# Altium PCB BD658T_AMP_ES4_220615_F.PcbDoc (part 1 of 4)
Units mm, origin at the board's own origin, x right, y up, seen from the top; angles counter-clockwise.
Board outline 153 x 112 mm, 4 copper layers (TOP, LAYER2, LAYER3, BOTTOM), stack 1.59 mm thick; 286 components, 184 nets, 896 pads, 614 vias.
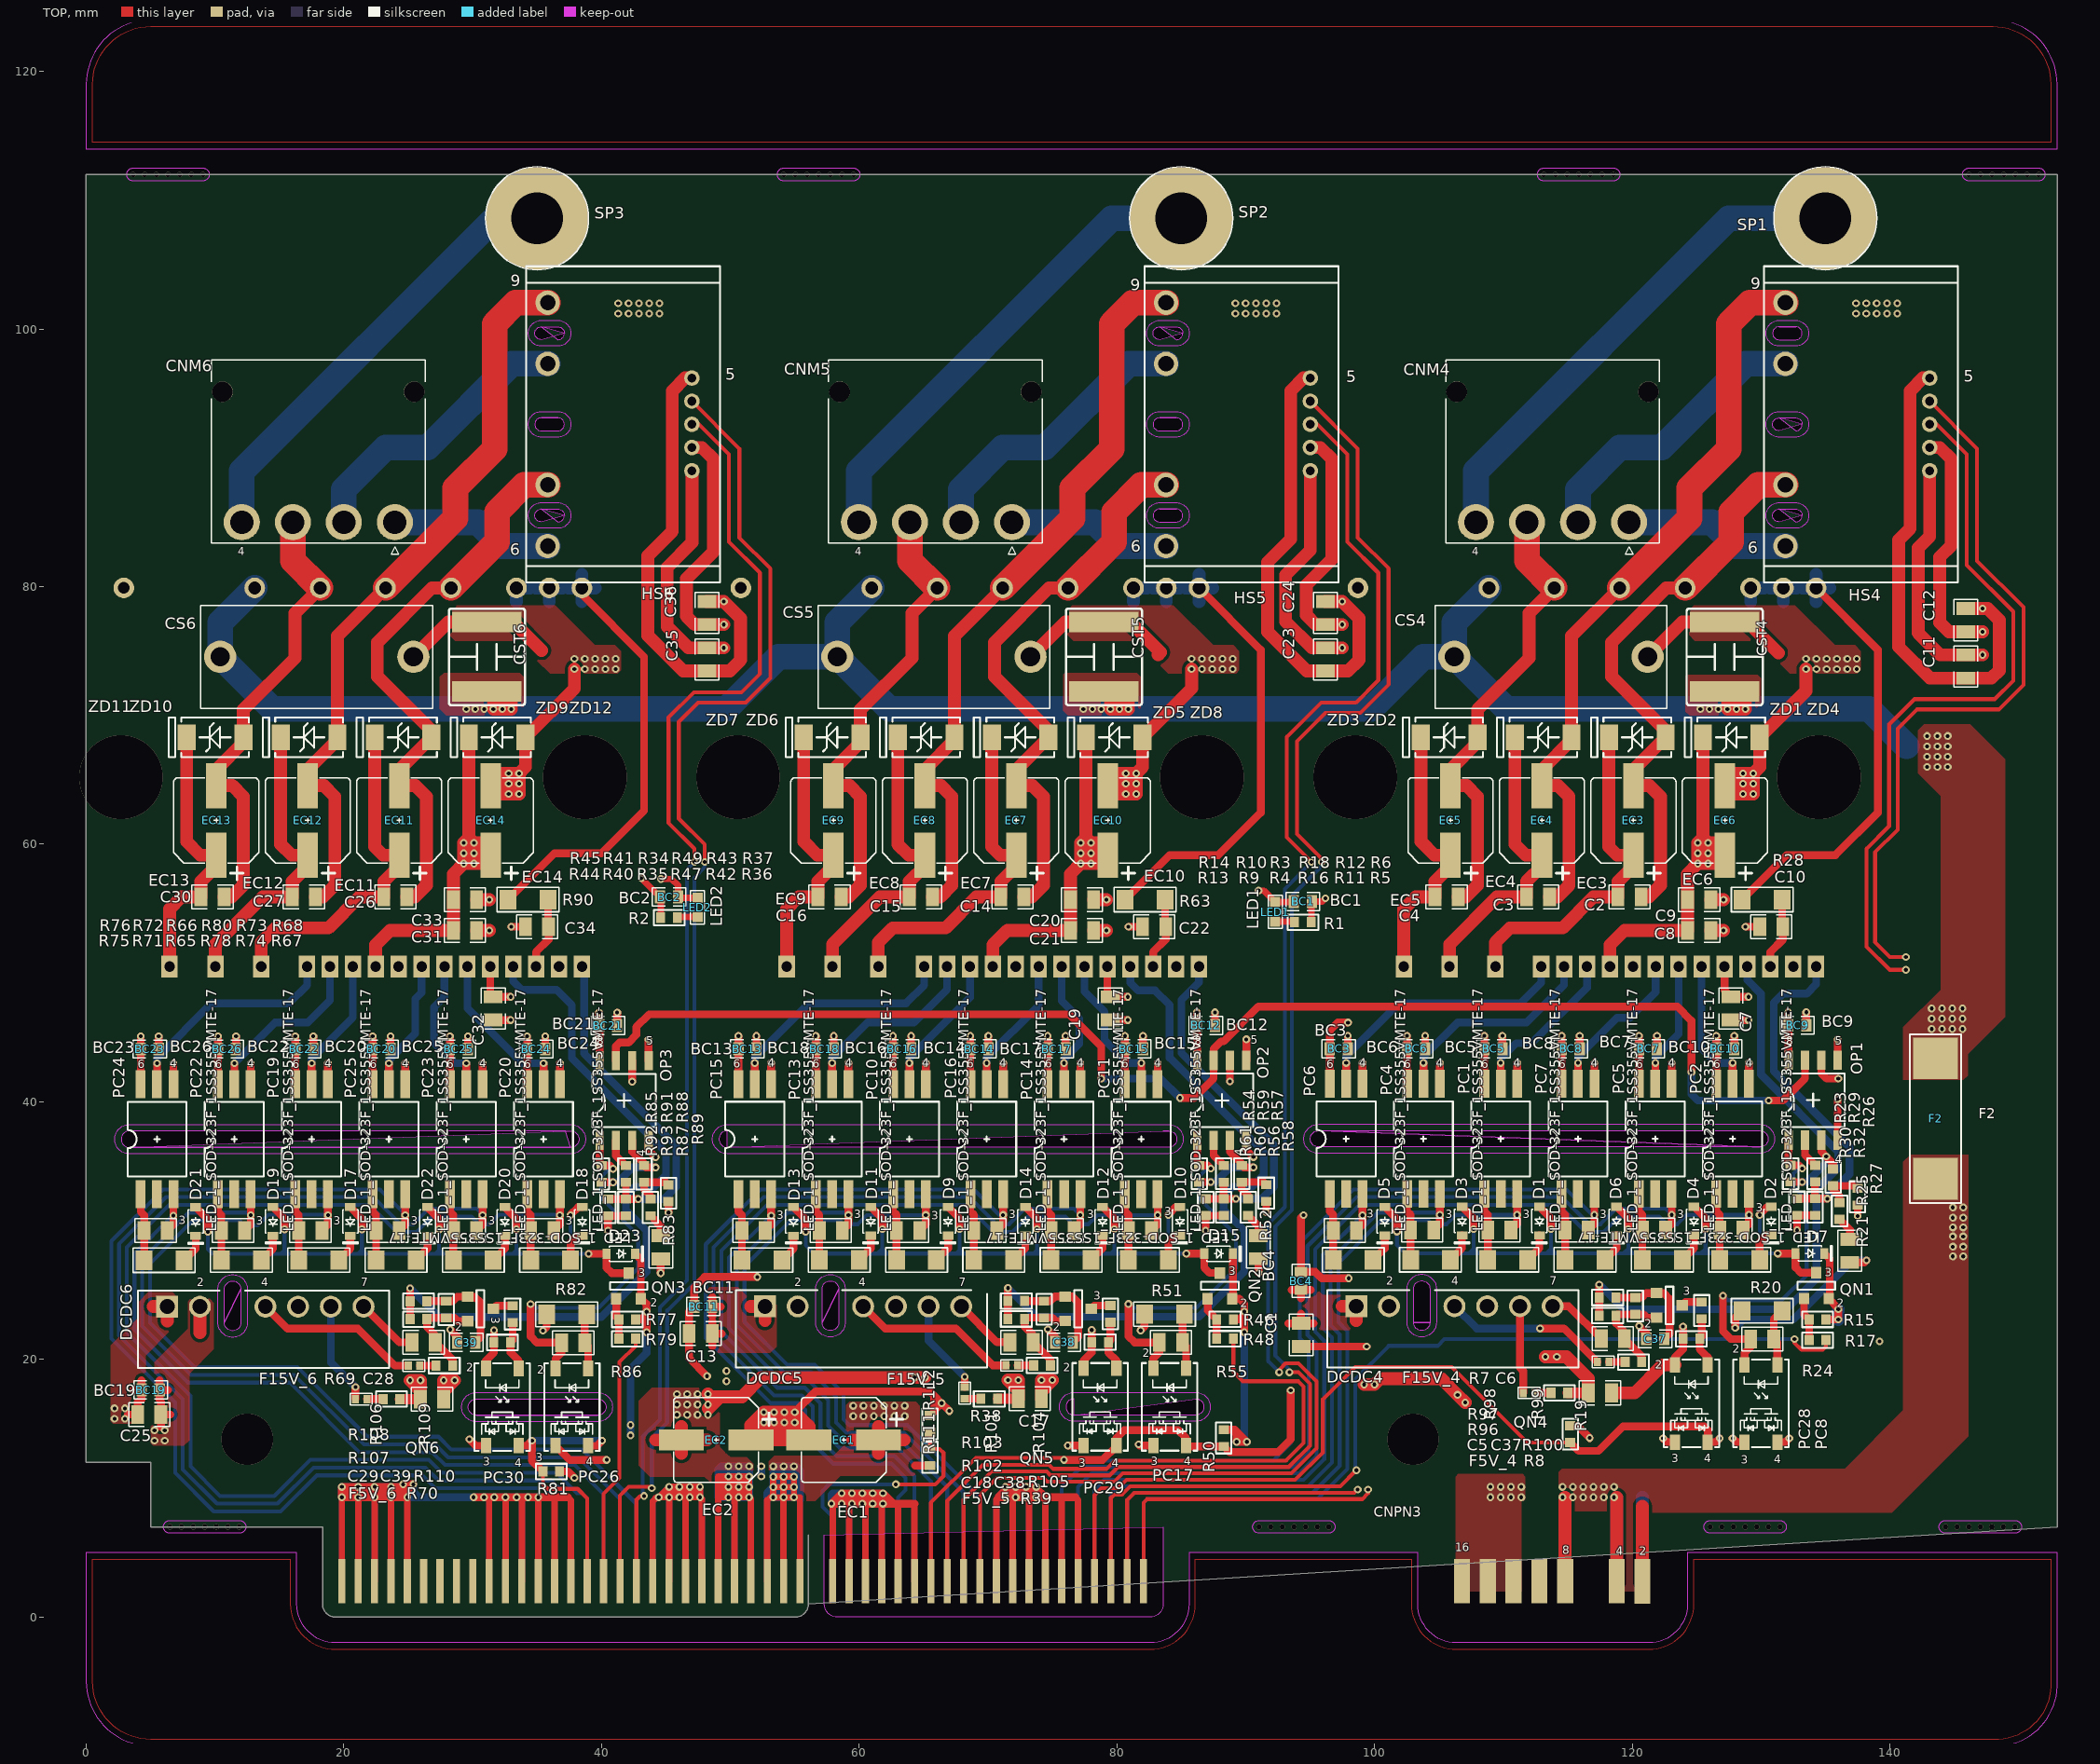
[diagram p0: TOP view]
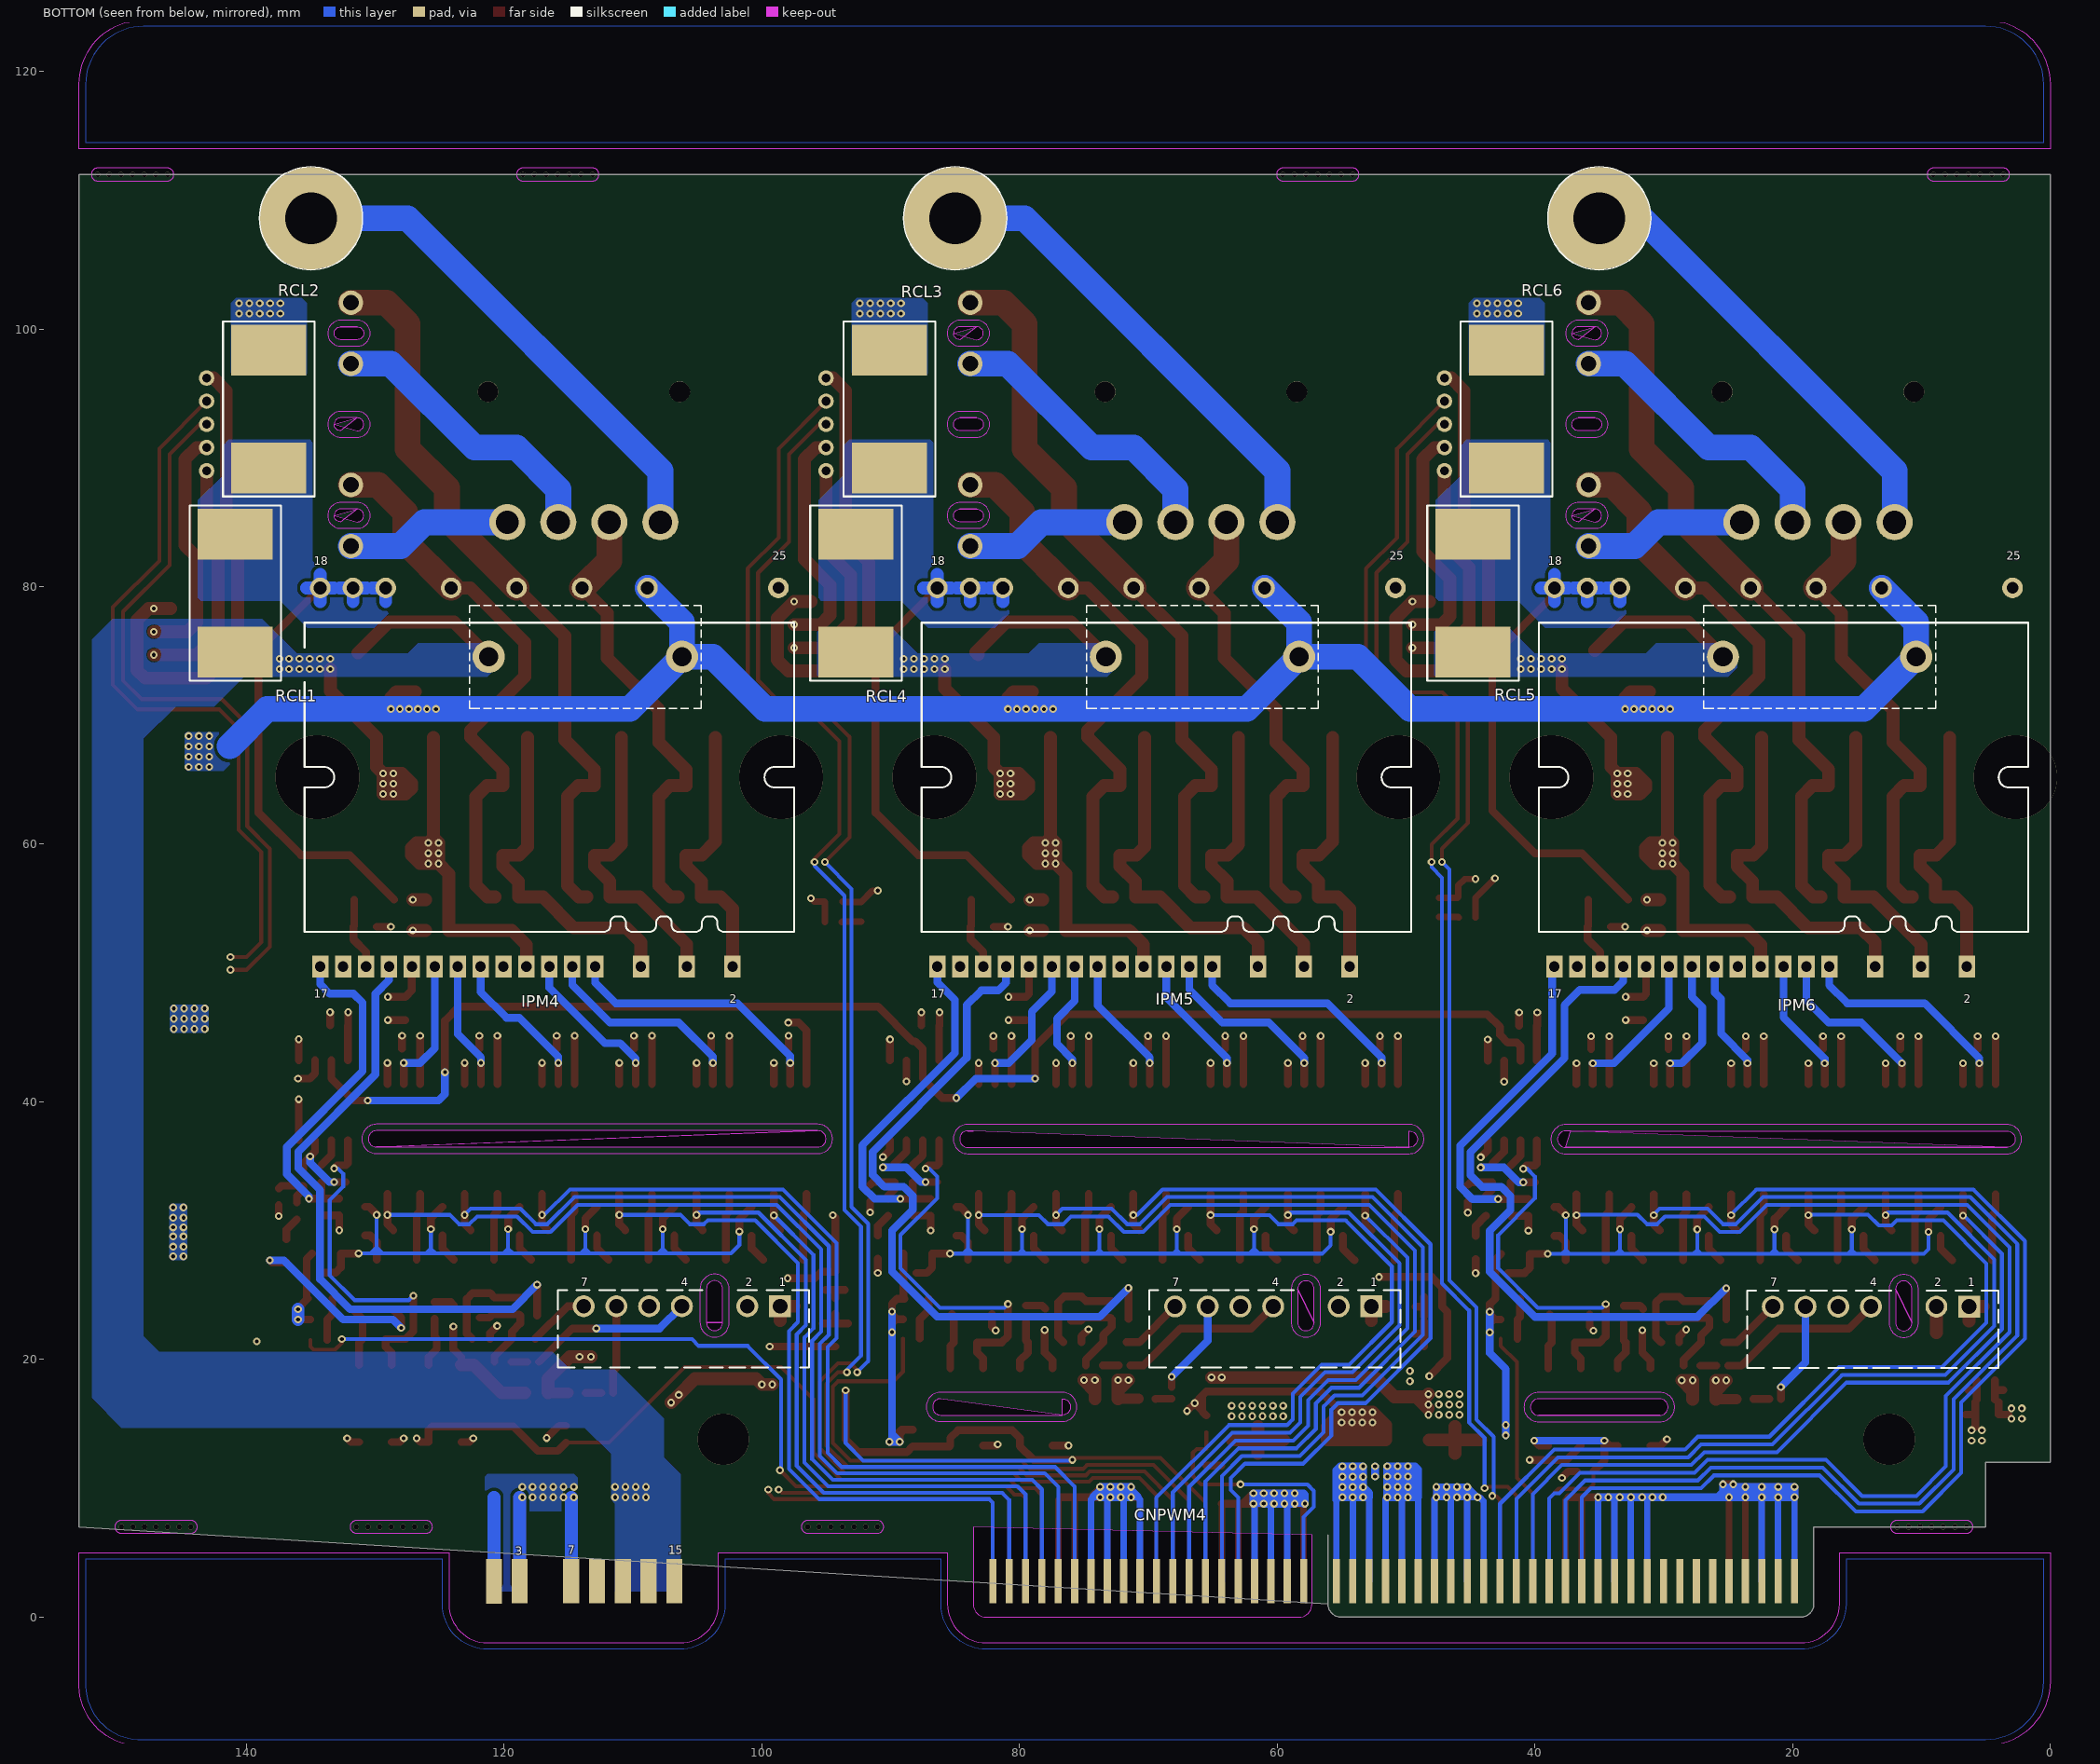
[diagram p1: BOTTOM view, seen from below]
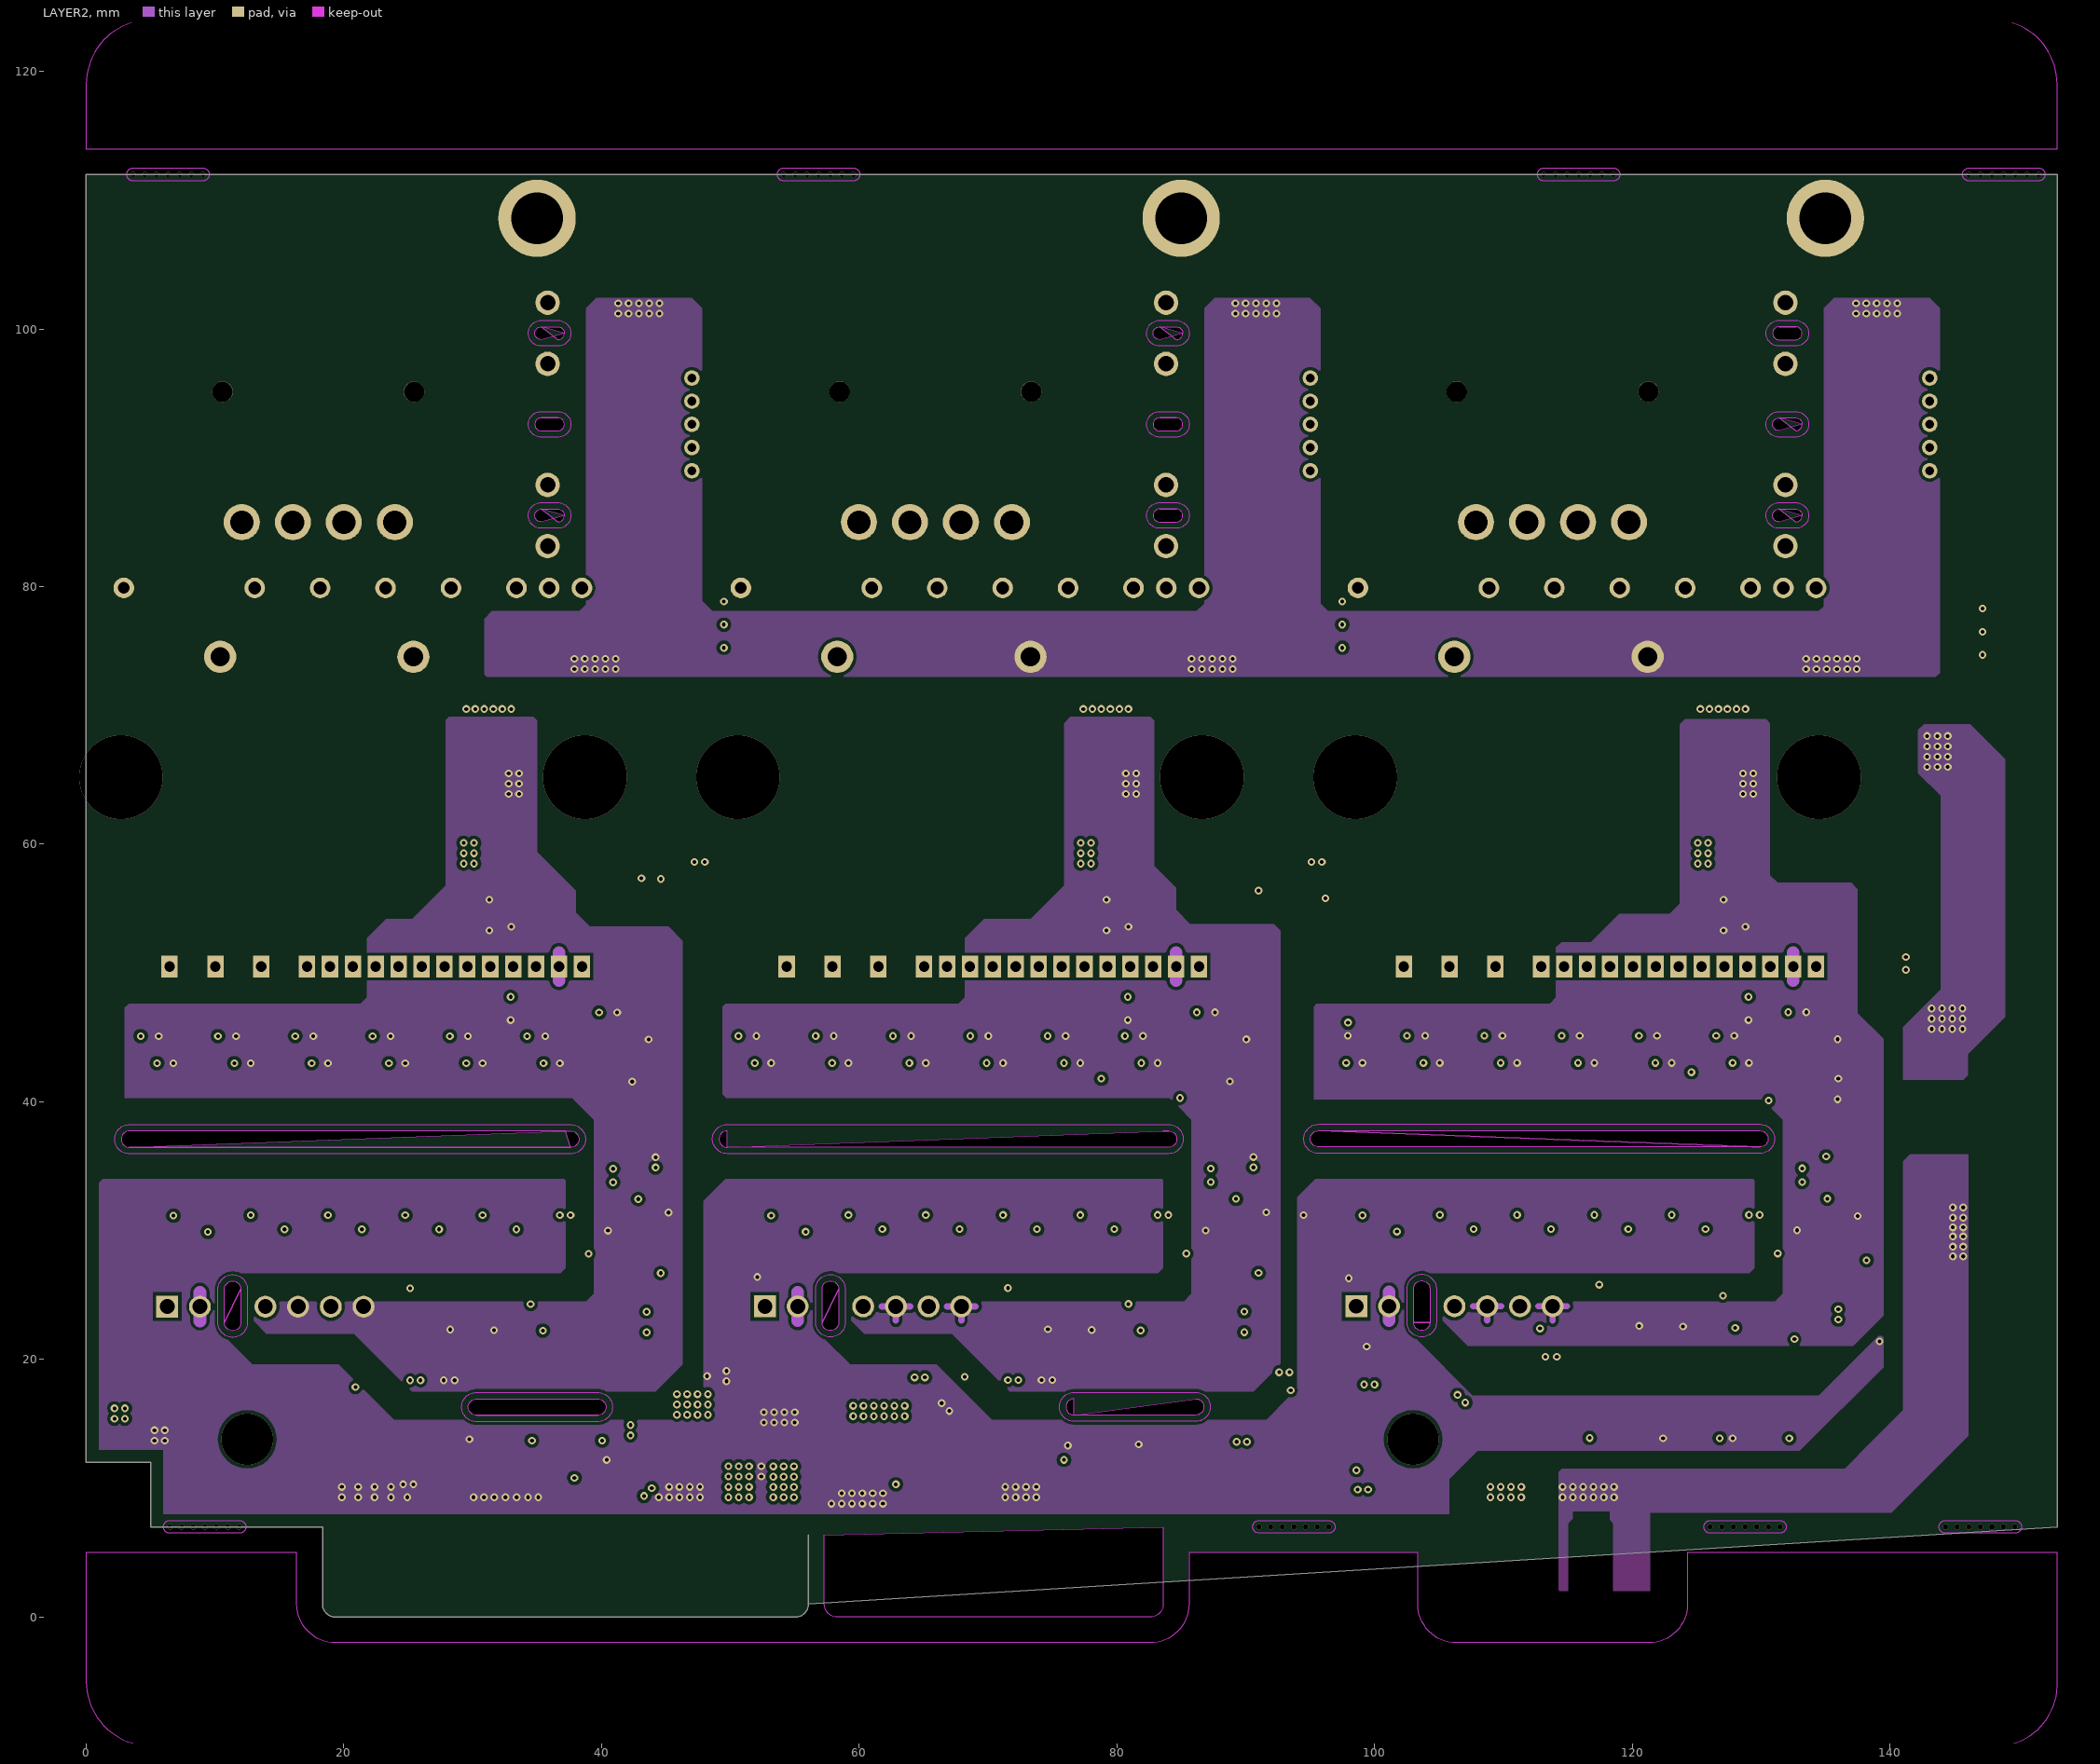
[diagram p2: LAYER2]
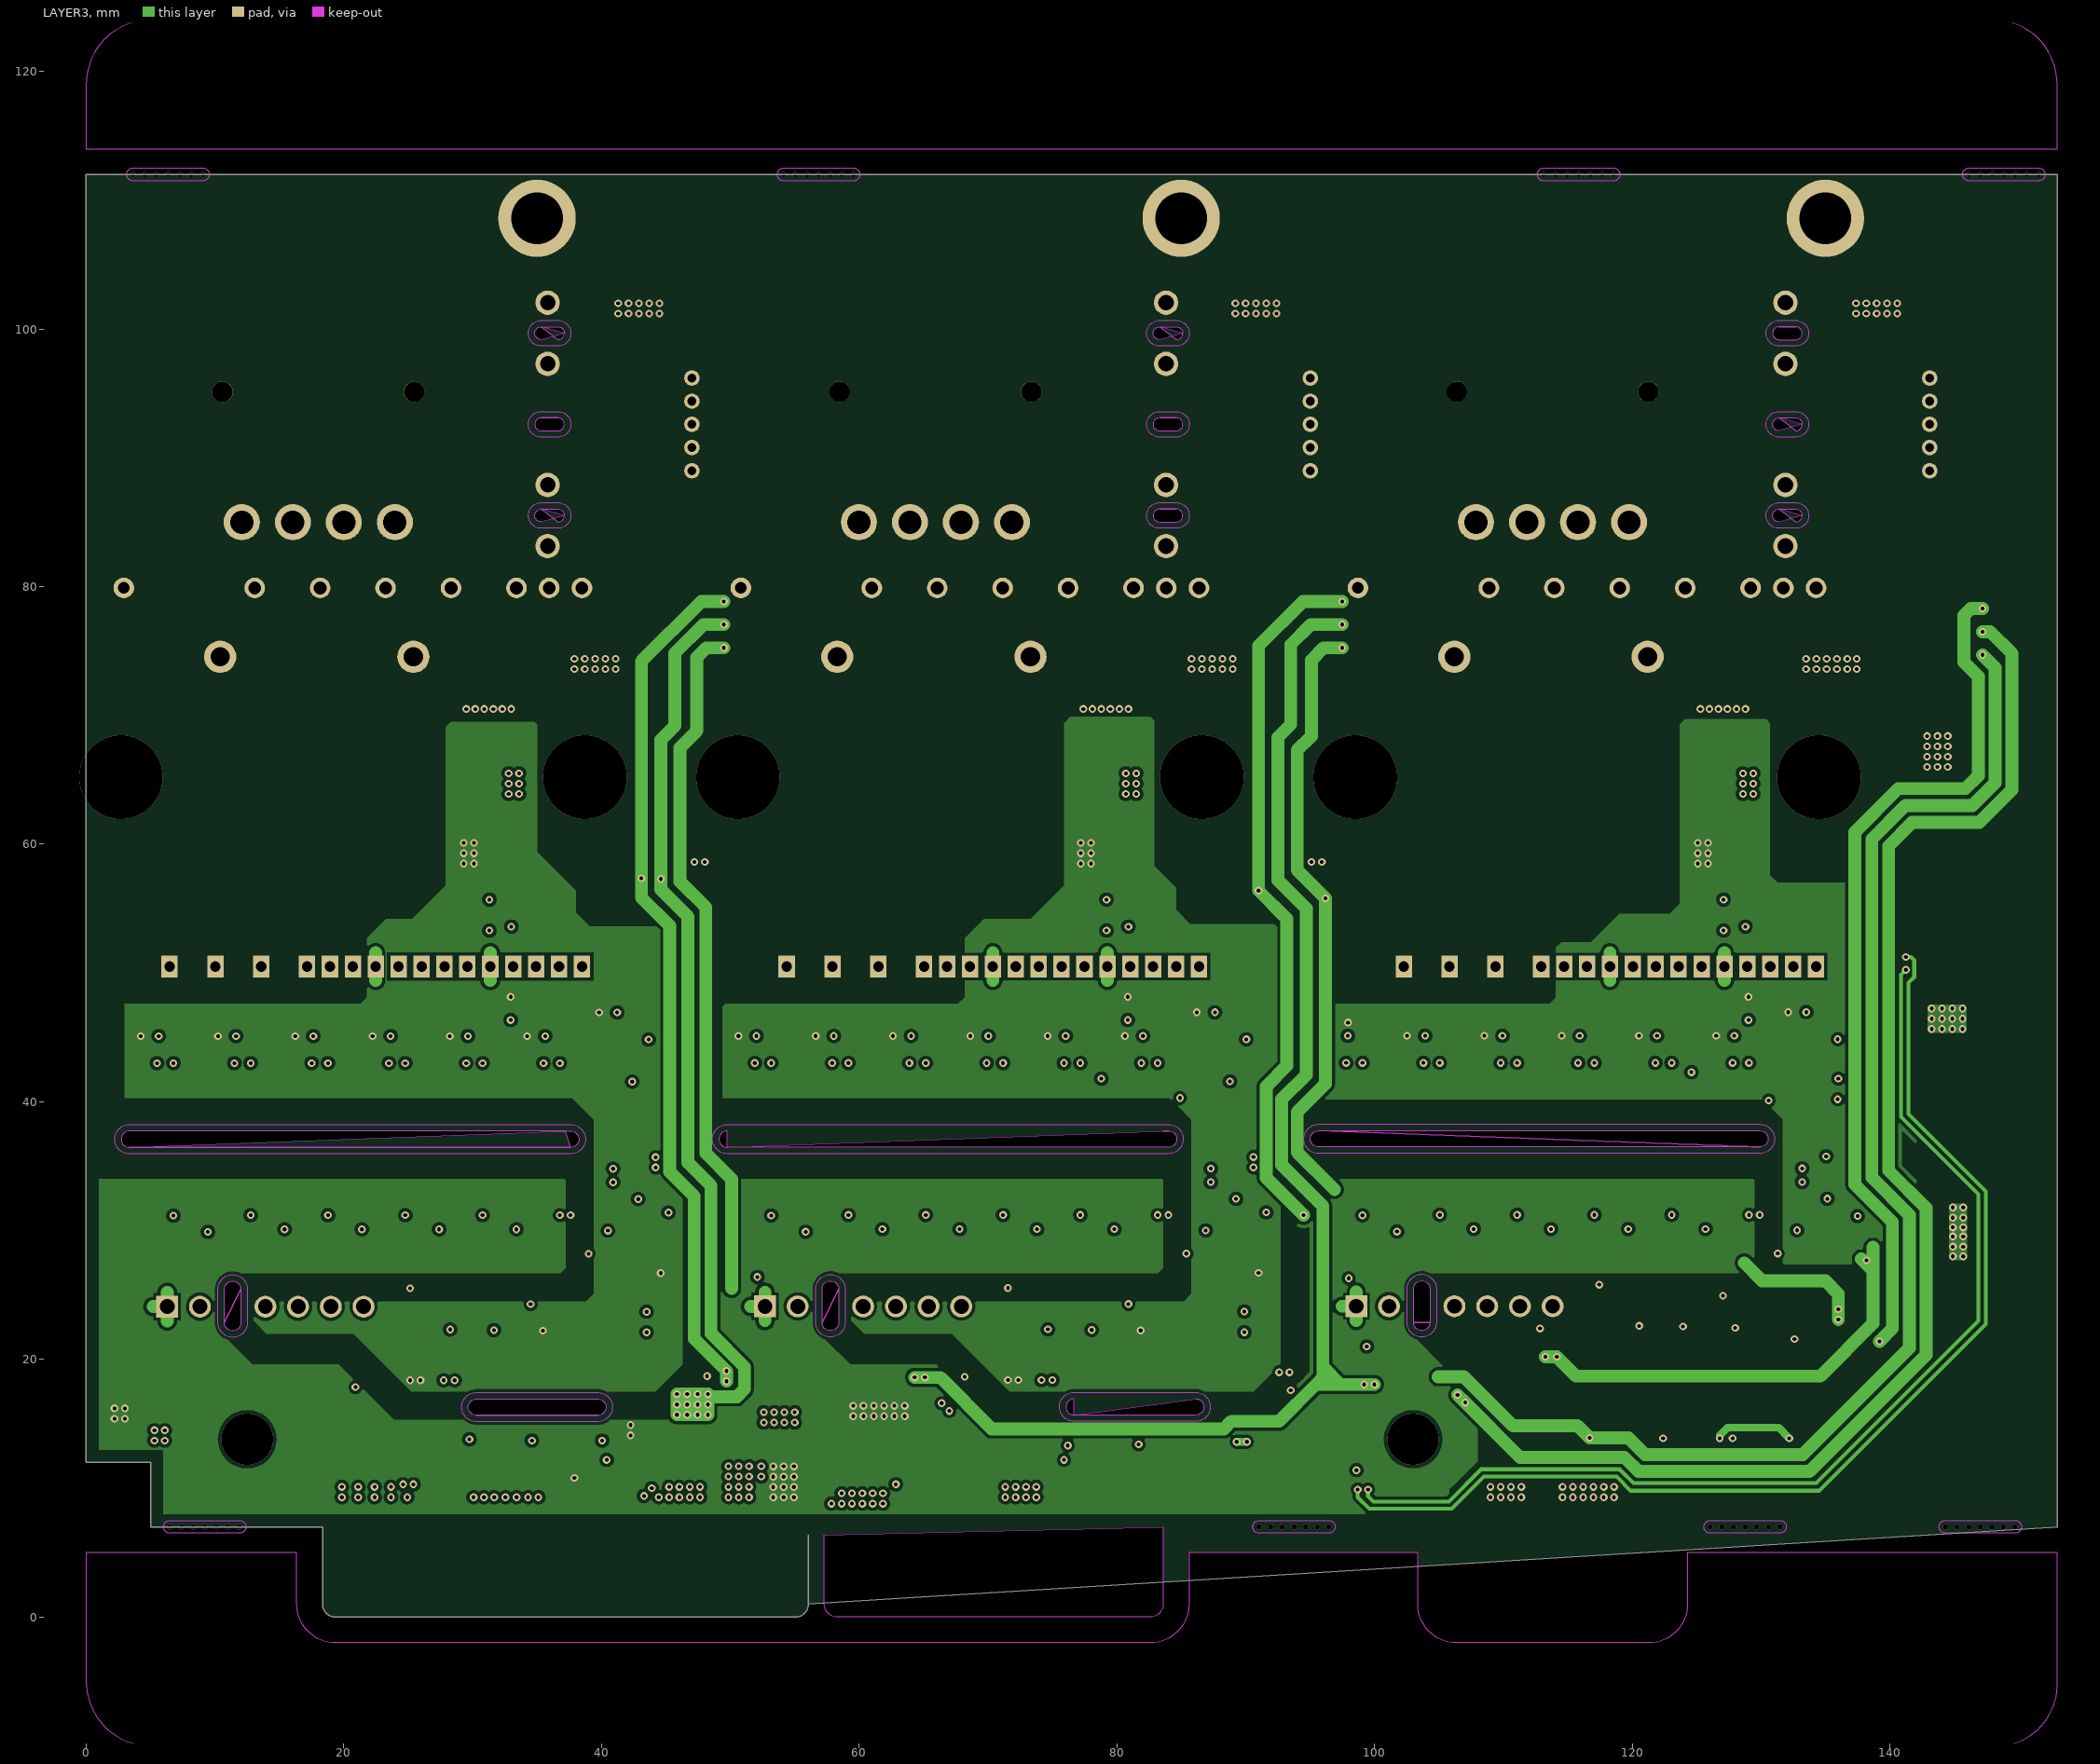
[diagram p3: LAYER3]

## Layer stack, top to bottom
Top Solder: solder mask 0.0102, Solder Resist, Dk 3.5
TOP: signal copper 0.07
Dielectric 1: core 0.29, FR-4, Dk 4.5
LAYER2: signal copper 0.035
Dielectric2: core 0.8, FR-4, Dk 4.5
LAYER3: signal copper 0.035
Dielectric3: core 0.29, FR-4, Dk 4.5
BOTTOM: signal copper 0.07
Bottom Solder: solder mask 0.0102, Solder Resist, Dk 3.5

## Board outline
153,7 153,112 0,112 0,12 5,12 5,7 18.346,7 18.346,1 ccw(c19.346,1) 55.056,0 ccw(c55.056,1) 56.056,6.38 56.056,1
cut-out: 36.62,99.175 ccw(c36.62,99.675) 35.32,99.175 cw(c35.32,99.675) 34.82,99.675 cw(c35.32,99.675) 36.62,100.175 cw(c36.62,99.675) 35.32,100.175
cut-out: 132.7,92.1 ccw(c132.7,92.6) 131.4,92.1 cw(c131.4,92.6) 130.9,92.6 cw(c131.4,92.6) 132.7,93.1 cw(c132.7,92.6) 131.4,93.1
cut-out: 84.62,99.175 ccw(c84.62,99.675) 83.32,99.175 cw(c83.32,99.675) 82.82,99.675 cw(c83.32,99.675) 84.62,100.175 cw(c84.62,99.675) 83.32,100.175
cut-out: 132.7,85.025 ccw(c132.7,85.525) 131.4,85.025 cw(c131.4,85.525) 130.9,85.525 cw(c131.4,85.525) 132.7,86.025 cw(c132.7,85.525) 131.4,86.025
cut-out: 36.62,85.025 ccw(c36.62,85.525) 35.32,85.025 cw(c35.32,85.525) 34.82,85.525 cw(c35.32,85.525) 36.62,86.025 cw(c36.62,85.525) 35.32,86.025
cut-out: 36.62,93.1 35.32,93.1 ccw(c35.32,92.6) 34.82,92.6 ccw(c35.32,92.6) 36.62,92.1 ccw(c36.62,92.6) 37.12,92.6 ccw(c36.62,92.6) 35.32,93.1
cut-out: 84.62,93.1 83.32,93.1 ccw(c83.32,92.6) 82.82,92.6 ccw(c83.32,92.6) 84.62,92.1 ccw(c84.62,92.6) 85.12,92.6 ccw(c84.62,92.6) 83.32,93.1
cut-out: 132.7,100.175 131.4,100.175 ccw(c131.4,99.675) 130.9,99.675 ccw(c131.4,99.675) 132.7,99.175 ccw(c132.7,99.675) 133.2,99.675 ccw(c132.7,99.675) 131.4,100.175
cut-out: 84.62,86.025 83.32,86.025 ccw(c83.32,85.525) 82.82,85.525 ccw(c83.32,85.525) 84.62,85.025 ccw(c84.62,85.525) 85.12,85.525 ccw(c84.62,85.525) 83.32,86.025
cut-out: 58.405,25.464 58.405,22.864 cw(c57.77,22.864) 57.135,25.464 cw(c57.77,25.464) 57.135,22.864
cut-out: 103.035,22.877 103.035,25.477 cw(c103.67,25.477) 104.305,25.477 104.305,22.877 cw(c103.67,22.877) 104.305,22.877
cut-out: 10.735,22.85 10.735,25.45 cw(c11.37,25.45) 12.005,22.85 cw(c11.37,22.85) 12.005,25.45
cut-out: 76.686,16.949 ccw(c76.686,16.314) 86.114,16.949 cw(c86.114,16.314) 86.114,15.679 76.686,15.679
cut-out: 30.286,16.935 39.714,16.935 cw(c39.714,16.3) 30.286,15.665 39.714,15.665 30.286,15.665 cw(c30.286,16.3)
cut-out: 37.2,37.731 3.353,37.731 ccw(c3.353,37.096) 37.2,37.731 37.617,37.731 cw(c37.617,37.096) 37,36.461 3.353,36.461 37,36.461 37.617,36.461
cut-out: 49.753,37.744 ccw(c49.753,37.109) 83.6,37.744 84.017,37.744 83.6,37.744 84.017,37.744 cw(c84.017,37.109) 84.017,36.474 83.4,36.474 49.753,36.474
cut-out: 95.653,37.758 129.5,37.758 129.917,37.758 cw(c129.917,37.123) 129.3,36.488 95.653,36.488 cw(c95.653,37.123) 129.3,36.488 129.917,36.488
cut-out: 83.596,7 83.596,1 cw(c82.596,1) 58.296,0 cw(c58.296,1) 57.296,6.38
cut-out: 0,114 153,114 153,119 ccw(c148,119) 5,124 ccw(c5,119) 0,114.3
cut-out: 99.95,-10 119.16,-10 135.356,-10 148,-10 ccw(c148.237,-5.237) 153,5 135.306,5 124.298,5 124.298,1 cw(c121.298,1) 119.51,-2 106.358,-2 cw(c106.358,1) 103.358,5 100,5 85.596,5 85.596,1 cw(c82.596,1) 19.346,-2 cw(c19.346,1) 16.346,5 0,5 0,-5 ccw(c5,-5) 27.154,-10

## Design rules (kind name [scope] priority, off if disabled: settings)
Clearance [All] p1: gap=0.254 ignorepadtopadclearanceinfootprint=FALSE except(0: Arc-Hole Track-Hole SMDPad-Hole THPad-Hole Via-Hole Fill-Hole Poly-Hole Region-Hole Text-Hole)
PlaneConnect [All] p1: planeconnectstyle=Direct reliefexpansion=0.508 reliefentries=4 reliefconductorwidth=0.254 reliefairgap=0.254
PolygonConnect [All] p1: connectstyle=Direct reliefconductorwidth=0.254 reliefentries=4 polygonreliefangle="90 Angle" airgapwidth=0.254
RoutingVias [All] p1: holewidth=0.711 width=1.27 viastyle="Through Hole" minholewidth=0.711 minwidth=1.27 maxholewidth=0.711 maxwidth=1.27
SolderMaskExpansion [All] p1: expansion=0.102 istentingtop=FALSE
Width [All] p1: maxlimit=0.254 minlimit=0.254 preferedwidth=0.254 impedanceprofiledriven=TRUE minimp=27.170000 maximp=122.750000 favimp=9.640000
29 further rules are at their usual default settings.

## Components (designator, comment, footprint, x,y, rotation, side; value= is the part's Value field where it differs from the comment)
BC1 "CAP NP_SMD-CAP-1608-HD_CL10B104" SILK_SINGLE_TOP 94.45,55.55 r180 top
BC2 "CAP NP_SMD-CAP-1608-HD_CL10B104" SILK_SINGLE_TOP 45.25,55.9 r0 top
BC3 "CAP NP_0_SMD-CAP-1608-HD_CL10B1" SILK_SINGLE_TOP 97.23,44.123 r180 top
BC4 "CAP NP_SMD-CAP-1608-HD_CL10B104" SILK_SINGLE_TOP 94.3,26.1 r90 top
BC5 "CAP NP_0_SMD-CAP-1608-HD_CL10B1" SILK_SINGLE_TOP 109.23,44.123 r180 top
BC6 "CAP NP_0_SMD-CAP-1608-HD_CL10B1" SILK_SINGLE_TOP 103.23,44.123 r180 top
BC7 "CAP NP_0_SMD-CAP-1608-HD_CL10B1" SILK_SINGLE_TOP 121.23,44.123 r180 top
BC8 "CAP NP_0_SMD-CAP-1608-HD_CL10B1" SILK_SINGLE_TOP 115.23,44.123 r180 top
BC9 "CAP NP_0_SMD-CAP-1608-HD_CL10B1" SILK_SINGLE_TOP 132.815,45.942 r180 top
BC10 "CAP NP_0_SMD-CAP-1608-HD_CL10B1" SILK_SINGLE_TOP 127.23,44.123 r180 top
BC11 "CAP NP_SMD-CAP-1608-HD_CL10B104" SILK_SINGLE_TOP 47.9,24.1 r180 top
BC12 "CAP NP_0_SMD-CAP-1608-HD_CL10B1" SILK_SINGLE_TOP 86.915,45.929 r180 top
BC13 "CAP NP_0_SMD-CAP-1608-HD_CL10B1" SILK_SINGLE_TOP 51.33,44.109 r180 top
BC14 "CAP NP_0_SMD-CAP-1608-HD_CL10B1" SILK_SINGLE_TOP 69.33,44.109 r180 top
BC15 "CAP NP_0_SMD-CAP-1608-HD_CL10B1" SILK_SINGLE_TOP 81.33,44.109 r180 top
BC16 "CAP NP_0_SMD-CAP-1608-HD_CL10B1" SILK_SINGLE_TOP 63.33,44.109 r180 top
BC17 "CAP NP_0_SMD-CAP-1608-HD_CL10B1" SILK_SINGLE_TOP 75.33,44.109 r180 top
BC18 "CAP NP_0_SMD-CAP-1608-HD_CL10B1" SILK_SINGLE_TOP 57.33,44.109 r180 top
BC19 "CAP NP_SMD-CAP-1608-HD_CL10B104" SILK_SINGLE_TOP 5,17.625 r0 top
BC20 "CAP NP_0_SMD-CAP-1608-HD_CL10B1" SILK_SINGLE_TOP 22.93,44.1 r180 top
BC21 "CAP NP_0_SMD-CAP-1608-HD_CL10B1" SILK_SINGLE_TOP 40.515,45.915 r180 top
BC22 "CAP NP_0_SMD-CAP-1608-HD_CL10B1" SILK_SINGLE_TOP 16.93,44.1 r180 top
BC23 "CAP NP_0_SMD-CAP-1608-HD_CL10B1" SILK_SINGLE_TOP 4.93,44.1 r180 top
BC24 "CAP NP_0_SMD-CAP-1608-HD_CL10B1" SILK_SINGLE_TOP 34.93,44.1 r180 top
BC25 "CAP NP_0_SMD-CAP-1608-HD_CL10B1" SILK_SINGLE_TOP 28.93,44.1 r180 top
BC26 "CAP NP_0_SMD-CAP-1608-HD_CL10B1" SILK_SINGLE_TOP 10.93,44.1 r180 top
C1 "CAP NP_SMD-CAP-2012-HD_CL21B105" SILKSCREEN_TOP#1 94.3,21.9 r270 top
C2 "CAP NP_SMD-CAP-2012-HD_CL21B1_1" SILKSCREEN_TOP#1 119.8,55.9 r0 top
C3 "CAP NP_SMD-CAP-2012-HD_CL21B1_1" SILKSCREEN_TOP#1 112.7,55.9 r0 top
C4 "CAP NP_SMD-CAP-2012-HD_CL21B1_1" SILKSCREEN_TOP#1 105.6,55.9 r0 top
C5 "CAP NP_SMD-CAP-2012-HD_CL21B1_2" SILKSCREEN_TOP#1 118.5,21.6 r180 top
C6 "CAP NP_SMD-CAP-2012-HD_CL21B106" SILKSCREEN_TOP#1 117.5,17.4 r0 top
C7 "CAP NP_SMD-CAP-2012-HD_CL21B1_1" SILKSCREEN_TOP#1 127.68,47.25 r270 top
C8 "CAP NP_SMD-CAP-2012-HD_CL21B1_1" SILKSCREEN_TOP#1 125.2,53.3 r0 top
C9 "CAP NP_SMD-CAP-2012-HD_CL21B1_1" SILKSCREEN_TOP#1 125.2,55.7 r0 top
C10 "CAP NP_SMD-CAP-2012-HD_CL21B102" SILKSCREEN_TOP#1 130.8,53.6 r180 top
C11 "CAP NP_SMD-CAP-2012-HD_CL21B1_1" SILKSCREEN_TOP#1 145.9,73.8 r270 top
C12 "CAP NP_SMD-CAP-2012-HD_CL21B1_1" SILKSCREEN_TOP#1 145.9,77.4 r270 top
C13 "CAP NP_SMD-CAP-2012-HD_CL21B105" SILKSCREEN_TOP#1 47.7,22 r180 top
C14 "CAP NP_SMD-CAP-2012-HD_CL21B1_1" SILKSCREEN_TOP#1 71.9,55.9 r0 top
C15 "CAP NP_SMD-CAP-2012-HD_CL21B1_1" SILKSCREEN_TOP#1 64.8,55.9 r0 top
C16 "CAP NP_SMD-CAP-2012-HD_CL21B1_1" SILKSCREEN_TOP#1 57.7,55.9 r0 top
C17 "CAP NP_SMD-CAP-2012-HD_CL21B106" SILKSCREEN_TOP#1 73.25,16.936 r0 top
C18 "CAP NP_SMD-CAP-2012-HD_CL21B1_2" SILKSCREEN_TOP#1 72.6,21.336 r180 top
C19 "CAP NP_SMD-CAP-2012-HD_CL21B1_1" SILKSCREEN_TOP#1 79.5,47.25 r270 top
C20 "CAP NP_SMD-CAP-2012-HD_CL21B1_1" SILKSCREEN_TOP#1 77.3,55.7 r0 top
C21 "CAP NP_SMD-CAP-2012-HD_CL21B1_1" SILKSCREEN_TOP#1 77.3,53.3 r0 top
C22 "CAP NP_SMD-CAP-2012-HD_CL21B102" SILKSCREEN_TOP#1 82.9,53.6 r180 top
C23 "CAP NP_SMD-CAP-2012-HD_CL21B1_1" SILKSCREEN_TOP#1 96.2,74.35 r270 top
C24 "CAP NP_SMD-CAP-2012-HD_CL21B1_1" SILKSCREEN_TOP#1 96.2,77.95 r270 top
C25 "CAP NP_SMD-CAP-2012-HD_CL21B105" SILKSCREEN_TOP#1 4.9,15.725 r0 top
C26 "CAP NP_SMD-CAP-2012-HD_CL21B1_1" SILKSCREEN_TOP#1 24,55.9 r0 top
C27 "CAP NP_SMD-CAP-2012-HD_CL21B1_1" SILKSCREEN_TOP#1 16.9,55.9 r0 top
C28 "CAP NP_SMD-CAP-2012-HD_CL21B106" SILKSCREEN_TOP#1 26.85,16.923 r0 top
C29 "CAP NP_SMD-CAP-2012-HD_CL21B1_2" SILKSCREEN_TOP#1 26.2,21.323 r180 top
C30 "CAP NP_SMD-CAP-2012-HD_CL21B1_1" SILKSCREEN_TOP#1 9.8,55.9 r0 top
C31 "CAP NP_SMD-CAP-2012-HD_CL21B1_1" SILKSCREEN_TOP#1 29.4,53.3 r0 top
C32 "CAP NP_SMD-CAP-2012-HD_CL21B1_1" SILKSCREEN_TOP#1 31.6,47.25 r270 top
C33 "CAP NP_SMD-CAP-2012-HD_CL21B1_1" SILKSCREEN_TOP#1 29.4,55.7 r0 top
C34 "CAP NP_SMD-CAP-2012-HD_CL21B102" SILKSCREEN_TOP#1 35,53.6 r180 top
C35 "CAP NP_SMD-CAP-2012-HD_CL21B1_1" SILKSCREEN_TOP#1 48.2,74.35 r270 top
C36 "CAP NP_SMD-CAP-2012-HD_CL21B1_1" SILKSCREEN_TOP#1 48.2,77.95 r270 top
C37 "CAP NP_SMD-CAP-1608-HD_CL10B822" SILK_SINGLE_TOP 121.8,21.6 r180 top
C38 "CAP NP_SMD-CAP-1608-HD_CL10B822" SILK_SINGLE_TOP 75.9,21.336 r180 top
C39 "CAP NP_SMD-CAP-1608-HD_CL10B822" SILK_SINGLE_TOP 29.5,21.323 r180 top
CNM4 "DF63-4P-3.96DS_CN4-DF634P3_96DS" ASSEMBLY_TOP#1 113.82,90.5 r0 top
CNM5 "DF63-4P-3.96DS_CN4-DF634P3_96DS" ASSEMBLY_TOP#1 65.92,90.5 r0 top
CNM6 "DF63-4P-3.96DS_CN4-DF634P3_96DS" ASSEMBLY_TOP#1 18.02,90.5 r0 top
CNPN3 "MEC2-08-01-L-DV-WT_0_CN16-MEC20" SILKSCREEN_TOP#2 113.828,3.5 r0 top
CNPWM4 "MECF-50-01-L-DV-WT_EDGECN100-ME" SILKSCREEN_BOTTOM#1 50.971,3.5 r0 bottom
CS4 "CAP NP_1_DIPCAP-MKS4J032204F00K" SILKSCREEN_TOP#3 113.7,74.55 r0 top
CS5 "CAP NP_1_DIPCAP-MKS4J032204F00K" SILKSCREEN_TOP#3 65.8,74.55 r0 top
CS6 "CAP NP_1_DIPCAP-MKS4J032204F00K" SILKSCREEN_TOP#3 17.9,74.55 r0 top
CST4 "CAP NP_1_SMD-CAP-5750-HD_C5750X" SILKSCREEN_TOP#4 127.13,74.55 r90 top
CST5 "CAP NP_1_SMD-CAP-5750-HD_C5750X" SILKSCREEN_TOP#4 78.95,74.55 r90 top
CST6 "CAP NP_1_SMD-CAP-5750-HD_C5750X" SILKSCREEN_TOP#4 31.05,74.55 r90 top
D1 "LED_1_SOD-323F_1SS355VMTE-17" SILKSCREEN_TOP#5 112.8,30.737 r90 top
D2 "LED_1_SOD-323F_1SS355VMTE-17" SILKSCREEN_TOP#5 130.8,30.737 r90 top
D3 "LED_1_SOD-323F_1SS355VMTE-17" SILKSCREEN_TOP#5 106.8,30.737 r90 top
D4 "LED_1_SOD-323F_1SS355VMTE-17" SILKSCREEN_TOP#5 124.8,30.737 r90 top
D5 "LED_1_SOD-323F_1SS355VMTE-17" SILKSCREEN_TOP#5 100.8,30.723 r90 top
D6 "LED_1_SOD-323F_1SS355VMTE-17" SILKSCREEN_TOP#5 118.8,30.737 r90 top
D7 "LED_1_SOD-323F_1SS355VMTE-17" SILKSCREEN_TOP#5 133.8,28.227 r180 top
D9 "LED_1_SOD-323F_1SS355VMTE-17" SILKSCREEN_TOP#5 66.9,30.723 r90 top
D10 "LED_1_SOD-323F_1SS355VMTE-17" SILKSCREEN_TOP#5 84.9,30.723 r90 top
D11 "LED_1_SOD-323F_1SS355VMTE-17" SILKSCREEN_TOP#5 60.9,30.723 r90 top
D12 "LED_1_SOD-323F_1SS355VMTE-17" SILKSCREEN_TOP#5 78.9,30.723 r90 top
D13 "LED_1_SOD-323F_1SS355VMTE-17" SILKSCREEN_TOP#5 54.9,30.709 r90 top
D14 "LED_1_SOD-323F_1SS355VMTE-17" SILKSCREEN_TOP#5 72.9,30.723 r90 top
D15 "LED_1_SOD-323F_1SS355VMTE-17" SILKSCREEN_TOP#5 87.9,28.214 r180 top
D17 "LED_1_SOD-323F_1SS355VMTE-17" SILKSCREEN_TOP#5 20.5,30.714 r90 top
D18 "LED_1_SOD-323F_1SS355VMTE-17" SILKSCREEN_TOP#5 38.5,30.714 r90 top
D19 "LED_1_SOD-323F_1SS355VMTE-17" SILKSCREEN_TOP#5 14.5,30.714 r90 top
D20 "LED_1_SOD-323F_1SS355VMTE-17" SILKSCREEN_TOP#5 32.5,30.714 r90 top
D21 "LED_1_SOD-323F_1SS355VMTE-17" SILKSCREEN_TOP#5 8.5,30.7 r90 top
D22 "LED_1_SOD-323F_1SS355VMTE-17" SILKSCREEN_TOP#5 26.5,30.714 r90 top
D23 "LED_1_SOD-323F_1SS355VMTE-17" SILKSCREEN_TOP#5 41.5,28.2 r180 top
DCDC4 "TPD150515S_DCDCCONVERTER-TPD150" SILKSCREEN_TOP#6 106.08,22.377 r0 top
DCDC5 "TPD150515S_DCDCCONVERTER-TPD150" SILKSCREEN_TOP#6 60.18,22.364 r0 top
DCDC6 "TPD150515S_DCDCCONVERTER-TPD150" SILKSCREEN_TOP#6 13.78,22.35 r0 top
EC1 "E_CAP_0_SMD-ALCAP-D6_3-NICHICON" DISPLAY_TOP 58.8,13.75 r0 top
EC2 "E_CAP_0_SMD-ALCAP-D6_3-NICHICON" DISPLAY_TOP 48.9,13.75 r0 top
EC3 "E_CAP_0_SMD-ALCAP-D6_3-NICHICON" DISPLAY_TOP 120.1,61.85 r270 top
EC4 "E_CAP_0_SMD-ALCAP-D6_3-NICHICON" DISPLAY_TOP 113,61.85 r270 top
EC5 "E_CAP_0_SMD-ALCAP-D6_3-NICHICON" DISPLAY_TOP 105.9,61.85 r270 top
EC6 "E_CAP_0_SMD-ALCAP-D6_3-NICHICON" DISPLAY_TOP 127.2,61.85 r270 top
EC7 "E_CAP_0_SMD-ALCAP-D6_3-NICHICON" DISPLAY_TOP 72.2,61.85 r270 top
EC8 "E_CAP_0_SMD-ALCAP-D6_3-NICHICON" DISPLAY_TOP 65.1,61.85 r270 top
EC9 "E_CAP_0_SMD-ALCAP-D6_3-NICHICON" DISPLAY_TOP 58,61.85 r270 top
EC10 "E_CAP_0_SMD-ALCAP-D6_3-NICHICON" DISPLAY_TOP 79.3,61.85 r270 top
EC11 "E_CAP_0_SMD-ALCAP-D6_3-NICHICON" DISPLAY_TOP 24.3,61.85 r270 top
EC12 "E_CAP_0_SMD-ALCAP-D6_3-NICHICON" DISPLAY_TOP 17.2,61.85 r270 top
EC13 "E_CAP_0_SMD-ALCAP-D6_3-NICHICON" DISPLAY_TOP 10.1,61.85 r270 top
EC14 "E_CAP_0_SMD-ALCAP-D6_3-NICHICON" DISPLAY_TOP 31.4,61.85 r270 top
F2 "0031_0.8231_SMD-FUSES-SF-3812F2" ASSEMBLY_TOP#2 143.55,38.7 r270 top
F5V_4 "FUSE-1_SMD-FUSES-1005-HD_F0402G" SILKSCREEN_TOP#7 117.75,19.8 r180 top
F5V_5 "FUSE-1_SMD-FUSES-1005-HD_F0402G" SILKSCREEN_TOP#7 71.85,19.536 r180 top
F5V_6 "FUSE-1_SMD-FUSES-1005-HD_F0402G" SILKSCREEN_TOP#7 25.45,19.523 r180 top
F15V_4 "FUSE-1_SMD-FUSES-1005-HD_F0402G" SILKSCREEN_TOP#7 112,17.4 r180 top
F15V_5 "FUSE-1_SMD-FUSES-1005-HD_F0402G" SILKSCREEN_TOP#7 68.2,17.4 r90 top
F15V_6 "FUSE-1_SMD-FUSES-1005-HD_F0402G" SILKSCREEN_TOP#7 21.35,16.923 r180 top
HS4 "HC-PRC15V4B15U_DCTC-HCPRC15V4B1" SILKSCREEN_TOP#8 137.75,92.6 r90 top
HS5 "HC-PRC15V4B15U_DCTC-HCPRC15V4B1" SILKSCREEN_TOP#8 89.67,92.6 r90 top
HS6 "HC-PRC15V4B15U_DCTC-HCPRC15V4B1" SILKSCREEN_TOP#8 41.67,92.6 r90 top
IPM4 "PSS15S92F6-A_INVERTER-PSS15S92F" SILKSCREEN_BOTTOM#2 116.5,65.2 r0 bottom
IPM5 "PSS15S92F6-A_INVERTER-PSS15S92F" SILKSCREEN_BOTTOM#2 68.6,65.2 r0 bottom
IPM6 "PSS15S92F6-A_INVERTER-PSS15S92F" SILKSCREEN_BOTTOM#2 20.7,65.2 r0 bottom
LED1 "SMD_LED_LED1608_SML-310YTT86" SILKSCREEN_TOP#9 92.3,54.75 r270 top
LED2 "SMD_LED_LED1608_SML-310YTT86" SILKSCREEN_TOP#9 47.45,55.1 r270 top
OP1 "OPA2340/SO_3_SOP8-UPC251G2-RENE" SILKSCREEN_TOP#10 134.05,40.127 r0 top
OP2 "OPA2340/SO_3_SOP8-UPC251G2-RENE" SILKSCREEN_TOP#10 88.15,40.114 r0 top
OP3 "OPA2340/SO_3_SOP8-UPC251G2-RENE" SILKSCREEN_TOP#10 41.75,40.1 r0 top
PC1 "AQY210S_0_SO6-ACPLP480-BROADCOM" DIMENSION#1 109.8,37.123 r0 top
PC2 "AQY210S_0_SO6-ACPLP480-BROADCOM" DIMENSION#1 127.8,37.123 r0 top
PC4 "AQY210S_0_SO6-ACPLP480-BROADCOM" DIMENSION#1 103.8,37.123 r0 top
PC5 "AQY210S_0_SO6-ACPLP480-BROADCOM" DIMENSION#1 121.8,37.123 r0 top
PC6 "AQY210S_0_SO6-ACPLP480-BROADCOM" DIMENSION#1 97.8,37.123 r0 top
PC7 "AQY210S_0_SO6-ACPLP480-BROADCOM" DIMENSION#1 115.8,37.123 r0 top
PC8 "TLP127_RELAY-AQY210S-NAIS_TLP12" SILKSCREEN_TOP#11 130,16.577 r180 top
PC10 "AQY210S_0_SO6-ACPLP480-BROADCOM" DIMENSION#1 63.9,37.109 r0 top
PC11 "AQY210S_0_SO6-ACPLP480-BROADCOM" DIMENSION#1 81.9,37.109 r0 top
PC13 "AQY210S_0_SO6-ACPLP480-BROADCOM" DIMENSION#1 57.9,37.109 r0 top
PC14 "AQY210S_0_SO6-ACPLP480-BROADCOM" DIMENSION#1 75.9,37.109 r0 top
PC15 "AQY210S_0_SO6-ACPLP480-BROADCOM" DIMENSION#1 51.9,37.109 r0 top
PC16 "AQY210S_0_SO6-ACPLP480-BROADCOM" DIMENSION#1 69.9,37.109 r0 top
PC17 "TLP127_RELAY-AQY210S-NAIS_TLP12" SILKSCREEN_TOP#11 84.1,16.314 r180 top
PC19 "AQY210S_0_SO6-ACPLP480-BROADCOM" DIMENSION#1 17.5,37.1 r0 top
PC20 "AQY210S_0_SO6-ACPLP480-BROADCOM" DIMENSION#1 35.5,37.1 r0 top
PC22 "AQY210S_0_SO6-ACPLP480-BROADCOM" DIMENSION#1 11.5,37.1 r0 top
PC23 "AQY210S_0_SO6-ACPLP480-BROADCOM" DIMENSION#1 29.5,37.1 r0 top
PC24 "AQY210S_0_SO6-ACPLP480-BROADCOM" DIMENSION#1 5.5,37.1 r0 top
PC25 "AQY210S_0_SO6-ACPLP480-BROADCOM" DIMENSION#1 23.5,37.1 r0 top
PC26 "TLP127_RELAY-AQY210S-NAIS_TLP12" SILKSCREEN_TOP#11 37.7,16.3 r180 top
PC28 "TLP127_RELAY-AQY210S-NAIS_PS270" SILKSCREEN_TOP#11 124.6,16.577 r180 top
PC29 "TLP127_RELAY-AQY210S-NAIS_PS270" SILKSCREEN_TOP#11 78.7,16.314 r180 top
PC30 "TLP127_RELAY-AQY210S-NAIS_PS270" SILKSCREEN_TOP#11 32.3,16.3 r180 top
QN1 "PNP_0_TO236MOD-2SA1313-TOSHIBA_" SILKSCREEN_TOP#12 134.3,25.727 r0 top
QN2 "PNP_0_TO236MOD-2SA1313-TOSHIBA_" SILKSCREEN_TOP#12 88,25.714 r0 top
QN3 "PNP_0_TO236MOD-2SA1313-TOSHIBA_" SILKSCREEN_TOP#12 42.1,25.7 r0 top
QN4 "PNP_0_TO236MOD-2SA1313-TOSHIBA_" SILKSCREEN_TOP#12 122.9,24.2 r270 top
QN5 "PNP_0_TO236MOD-2SA1313-TOSHIBA_" SILKSCREEN_TOP#12 77,23.936 r270 top
QN6 "PNP_0_TO236MOD-2SA1313-TOSHIBA_" SILKSCREEN_TOP#12 30.6,23.923 r270 top
R1 "R_SMD-RES-1608-HD_RC1608F103" DIMENSION#2 94.45,53.95 r0 top
R2 "R_SMD-RES-1608-HD_RC1608F103" DIMENSION#2 45.25,54.3 r180 top
R3 "R_0_SMD-RES-2012-HD_RC2012F511" SILKSCREEN_TOP#1 109.7,30.037 r0 top
R4 "R_0_SMD-RES-3216-HD_RC3216F202" SILKSCREEN_TOP#13 110.35,27.737 r180 top
R5 "R_0_SMD-RES-3216-HD_RC3216F202" SILKSCREEN_TOP#13 128.35,27.737 r180 top
R6 "R_0_SMD-RES-2012-HD_RC2012F511" SILKSCREEN_TOP#1 127.7,30.037 r0 top
R7 "R_0_SMD-RES-1608-HD_RC1608F000" DIMENSION#2 114.35,17.4 r180 top
R8 "R_0_SMD-RES-1608-HD_RC1608F000" DIMENSION#2 120.1,19.8 r180 top
R9 "R_0_SMD-RES-3216-HD_RC3216F202" SILKSCREEN_TOP#13 104.35,27.737 r180 top
R10 "R_0_SMD-RES-2012-HD_RC2012F511" SILKSCREEN_TOP#1 103.7,30.037 r0 top
R11 "R_0_SMD-RES-3216-HD_RC3216F202" SILKSCREEN_TOP#13 122.35,27.737 r180 top
R12 "R_0_SMD-RES-2012-HD_RC2012F511" SILKSCREEN_TOP#1 121.7,30.037 r0 top
R13 "R_0_SMD-RES-3216-HD_RC3216F202" SILKSCREEN_TOP#13 98.35,27.723 r180 top
R14 "R_0_SMD-RES-2012-HD_RC2012F511" SILKSCREEN_TOP#1 97.7,30.023 r0 top
R15 "R_0_SMD-RES-1608-HD_RC1608F103" DIMENSION#2 134.4,23.1 r180 top
R16 "R_0_SMD-RES-3216-HD_RC3216F202" SILKSCREEN_TOP#13 116.35,27.737 r180 top
R17 "R_0_SMD-RES-1608-HD_RC1608F222" DIMENSION#2 134.4,21.5 r180 top
R18 "R_0_SMD-RES-2012-HD_RC2012F511" SILKSCREEN_TOP#1 115.7,30.037 r0 top
R19 "R_0_SMD-RES-1608-HD_RC1608F103" DIMENSION#2 115.2,14.2 r90 top
R20 "R_0_SMD-RES-3216-HD_RC3216F202" SILKSCREEN_TOP#13 130.1,23.777 r0 top
R21 "R_0_SMD-RES-2012-HD_RC2012F511" SILKSCREEN_TOP#1 136.9,28.427 r90 top
R23 "R_0_SMD-RES-1608-HD_RC1608F105" DIMENSION#2 132.3,34.427 r270 top
R24 "R_0_SMD-RES-2012-HD_RC2012F511" SILKSCREEN_TOP#1 130.1,21.577 r180 top
R25 "R_0_SMD-RES-1608-HD_RC1608F103" DIMENSION#2 136.1,31.527 r90 top
R26 "R_0_SMD-RES-1608-HD_RC1608F103" DIMENSION#2 135.6,34.127 r270 top
R27 "R_0_SMD-RES-1608-HD_RC1608F222" DIMENSION#2 137.5,32.627 r270 top
R28 "R_SMD-RES-3216-HD_RC3216F202" SILKSCREEN_TOP#13 130.1,55.7 r180 top
R29 "R_0_SMD-RES-1608-HD_RC1608F103" DIMENSION#2 134.2,34.427 r270 top
R30 "R_0_SMD-RES-1608-HD_RC1608F103" DIMENSION#2 132.8,31.827 r270 top
R32 "R_0_SMD-RES-1608-HD_RC1608F103" DIMENSION#2 134.2,31.827 r270 top
R34 "R_0_SMD-RES-2012-HD_RC2012F511" SILKSCREEN_TOP#1 63.8,30.023 r0 top
R35 "R_0_SMD-RES-3216-HD_RC3216F202" SILKSCREEN_TOP#13 64.45,27.723 r180 top
R36 "R_0_SMD-RES-3216-HD_RC3216F202" SILKSCREEN_TOP#13 82.45,27.723 r180 top
R37 "R_0_SMD-RES-2012-HD_RC2012F511" SILKSCREEN_TOP#1 81.8,30.023 r0 top
R38 "R_0_SMD-RES-1608-HD_RC1608F000" DIMENSION#2 70.1,16.936 r180 top
R39 "R_0_SMD-RES-1608-HD_RC1608F000" DIMENSION#2 74.2,19.536 r180 top
R40 "R_0_SMD-RES-3216-HD_RC3216F202" SILKSCREEN_TOP#13 58.45,27.723 r180 top
R41 "R_0_SMD-RES-2012-HD_RC2012F511" SILKSCREEN_TOP#1 57.8,30.023 r0 top
R42 "R_0_SMD-RES-3216-HD_RC3216F202" SILKSCREEN_TOP#13 76.45,27.723 r180 top
R43 "R_0_SMD-RES-2012-HD_RC2012F511" SILKSCREEN_TOP#1 75.8,30.023 r0 top
R44 "R_0_SMD-RES-3216-HD_RC3216F202" SILKSCREEN_TOP#13 52.45,27.709 r180 top
R45 "R_0_SMD-RES-2012-HD_RC2012F511" SILKSCREEN_TOP#1 51.8,30.009 r0 top
R46 "R_0_SMD-RES-1608-HD_RC1608F103" DIMENSION#2 88.4,23.114 r180 top
R47 "R_0_SMD-RES-3216-HD_RC3216F202" SILKSCREEN_TOP#13 70.45,27.723 r180 top
R48 "R_0_SMD-RES-1608-HD_RC1608F222" DIMENSION#2 88.4,21.614 r180 top
R49 "R_0_SMD-RES-2012-HD_RC2012F511" SILKSCREEN_TOP#1 69.8,30.023 r0 top
R50 "R_0_SMD-RES-1608-HD_RC1608F103" DIMENSION#2 88.3,13.9 r90 top
R51 "R_0_SMD-RES-3216-HD_RC3216F202" SILKSCREEN_TOP#13 83.7,23.514 r0 top
R52 "R_0_SMD-RES-2012-HD_RC2012F511" SILKSCREEN_TOP#1 91,28.714 r90 top
R54 "R_0_SMD-RES-1608-HD_RC1608F105" DIMENSION#2 86.4,34.414 r270 top
R55 "R_0_SMD-RES-2012-HD_RC2012F511" SILKSCREEN_TOP#1 84.2,21.314 r180 top
R56 "R_0_SMD-RES-1608-HD_RC1608F103" DIMENSION#2 90.2,31.814 r90 top
R57 "R_0_SMD-RES-1608-HD_RC1608F103" DIMENSION#2 89.7,34.414 r270 top
R58 "R_0_SMD-RES-1608-HD_RC1608F222" DIMENSION#2 91.6,32.914 r270 top
R59 "R_0_SMD-RES-1608-HD_RC1608F103" DIMENSION#2 88.3,34.414 r270 top
R60 "R_0_SMD-RES-1608-HD_RC1608F103" DIMENSION#2 88.3,31.814 r270 top
R61 "R_0_SMD-RES-1608-HD_RC1608F103" DIMENSION#2 86.9,31.814 r270 top
R63 "R_SMD-RES-3216-HD_RC3216F202" SILKSCREEN_TOP#13 82.2,55.7 r180 top
R65 "R_0_SMD-RES-3216-HD_RC3216F202" SILKSCREEN_TOP#13 18.05,27.714 r180 top
R66 "R_0_SMD-RES-2012-HD_RC2012F511" SILKSCREEN_TOP#1 17.4,30.014 r0 top
R67 "R_0_SMD-RES-3216-HD_RC3216F202" SILKSCREEN_TOP#13 36.05,27.714 r180 top
R68 "R_0_SMD-RES-2012-HD_RC2012F511" SILKSCREEN_TOP#1 35.4,30.014 r0 top
R69 "R_0_SMD-RES-1608-HD_RC1608F000" DIMENSION#2 23.7,16.923 r180 top
R70 "R_0_SMD-RES-1608-HD_RC1608F000" DIMENSION#2 27.8,19.523 r180 top
R71 "R_0_SMD-RES-3216-HD_RC3216F202" SILKSCREEN_TOP#13 12.05,27.714 r180 top
R72 "R_0_SMD-RES-2012-HD_RC2012F511" SILKSCREEN_TOP#1 11.4,30.014 r0 top
R73 "R_0_SMD-RES-2012-HD_RC2012F511" SILKSCREEN_TOP#1 29.4,30.014 r0 top
R74 "R_0_SMD-RES-3216-HD_RC3216F202" SILKSCREEN_TOP#13 30.05,27.714 r180 top
R75 "R_0_SMD-RES-3216-HD_RC3216F202" SILKSCREEN_TOP#13 6.05,27.7 r180 top
R76 "R_0_SMD-RES-2012-HD_RC2012F511" SILKSCREEN_TOP#1 5.4,30 r0 top
R77 "R_0_SMD-RES-1608-HD_RC1608F103" DIMENSION#2 42,23.1 r180 top
R78 "R_0_SMD-RES-3216-HD_RC3216F202" SILKSCREEN_TOP#13 24.05,27.714 r180 top
R79 "R_0_SMD-RES-1608-HD_RC1608F222" DIMENSION#2 42,21.6 r180 top
R80 "R_0_SMD-RES-2012-HD_RC2012F511" SILKSCREEN_TOP#1 23.4,30.014 r0 top
R81 "R_0_SMD-RES-1608-HD_RC1608F103" DIMENSION#2 36.1,11.3 r0 top
R82 "R_0_SMD-RES-3216-HD_RC3216F202" SILKSCREEN_TOP#13 37.3,23.5 r0 top
R83 "R_0_SMD-RES-2012-HD_RC2012F511" SILKSCREEN_TOP#1 44.6,28.7 r90 top
R85 "R_0_SMD-RES-1608-HD_RC1608F105" DIMENSION#2 40,34.4 r270 top
R86 "R_0_SMD-RES-2012-HD_RC2012F511" SILKSCREEN_TOP#1 37.8,21.3 r180 top
R87 "R_0_SMD-RES-1608-HD_RC1608F103" DIMENSION#2 43.8,31.8 r90 top
R88 "R_0_SMD-RES-1608-HD_RC1608F103" DIMENSION#2 43.3,34.4 r270 top
R89 "R_0_SMD-RES-1608-HD_RC1608F222" DIMENSION#2 45.2,32.9 r270 top
R90 "R_SMD-RES-3216-HD_RC3216F202" SILKSCREEN_TOP#13 34.3,55.7 r180 top
R91 "R_0_SMD-RES-1608-HD_RC1608F103" DIMENSION#2 41.9,34.4 r270 top
R92 "R_0_SMD-RES-1608-HD_RC1608F103" DIMENSION#2 40.5,31.8 r270 top
R93 "R_0_SMD-RES-1608-HD_RC1608F103" DIMENSION#2 41.9,31.8 r270 top
R96 "R_0_SMD-RES-1608-HD_RC1608F103" DIMENSION#2 118.1,23.4 r180 top
R97 "R_0_SMD-RES-1608-HD_RC1608F102" DIMENSION#2 118.1,24.8 r180 top
R98 "R_0_SMD-RES-1608-HD_RC1608F103" DIMENSION#2 120.25,24.15 r90 top
R99 "R_0_SMD-RES-1608-HD_RC1608F271" DIMENSION#2 125.4,23.8 r90 top
R100 "R_0_SMD-RES-1608-HD_RC1608F271" DIMENSION#2 124.6,21.6 r0 top
R101 "R_0_SMD-RES-1608-HD_RC1608F103" DIMENSION#2 74.35,23.886 r90 top
R102 "R_0_SMD-RES-1608-HD_RC1608F103" DIMENSION#2 72.2,23.136 r180 top
R103 "R_0_SMD-RES-1608-HD_RC1608F102" DIMENSION#2 72.2,24.536 r180 top
R104 "R_0_SMD-RES-1608-HD_RC1608F271" DIMENSION#2 79.5,23.536 r90 top
R105 "R_0_SMD-RES-1608-HD_RC1608F271" DIMENSION#2 78.7,21.336 r0 top
R106 "R_0_SMD-RES-1608-HD_RC1608F103" DIMENSION#2 27.95,23.873 r90 top
R107 "R_0_SMD-RES-1608-HD_RC1608F103" DIMENSION#2 25.8,23.123 r180 top
R108 "R_0_SMD-RES-1608-HD_RC1608F102" DIMENSION#2 25.8,24.523 r180 top
R109 "R_0_SMD-RES-1608-HD_RC1608F271" DIMENSION#2 33.1,23.523 r90 top
R110 "R_0_SMD-RES-1608-HD_RC1608F271" DIMENSION#2 32.3,21.323 r0 top
R111 "R_0_SMD-RES-1608-HD_RC1608F103" DIMENSION#2 65.5,12.4 r270 top
R112 "R_0_SMD-RES-1608-HD_RC1608F103" DIMENSION#2 65.5,15 r270 top
RCL1 "R_0_SMD-RES-WSR5R0250FEA-VISHAY" SILKSCREEN_BOTTOM#3 140.88,79.5 r90 bottom
RCL2 "R_0_SMD-RES-WSR5R0250FEA-VISHAY" SILKSCREEN_BOTTOM#3 138.28,93.8 r270 bottom
RCL3 "R_0_SMD-RES-WSR5R0250FEA-VISHAY" SILKSCREEN_BOTTOM#3 90.1,93.8 r270 bottom
RCL4 "R_0_SMD-RES-WSR5R0250FEA-VISHAY" SILKSCREEN_BOTTOM#3 92.7,79.5 r90 bottom
RCL5 "R_0_SMD-RES-WSR5R0250FEA-VISHAY" SILKSCREEN_BOTTOM#3 44.8,79.5 r90 bottom
RCL6 "R_0_SMD-RES-WSR5R0250FEA-VISHAY" SILKSCREEN_BOTTOM#3 42.2,93.8 r270 bottom
SP1 "HOLE_1_HOLE4_0-8_0_HOLE" ASSEMBLY_TOP#3 135,108.6 r0 top
SP2 "HOLE_1_HOLE4_0-8_0_HOLE" ASSEMBLY_TOP#3 85,108.6 r0 top
SP3 "HOLE_1_HOLE4_0-8_0_HOLE" ASSEMBLY_TOP#3 35,108.6 r0 top
ZD1 "PDZV24B_0_SOD128-PDZV24B-ROHM_R" SILKSCREEN_TOP#14 120.4,68.3 r0 top
ZD2 "PDZV24B_0_SOD128-PDZV24B-ROHM_R" SILKSCREEN_TOP#14 113.1,68.3 r0 top
ZD3 "PDZV24B_0_SOD128-PDZV24B-ROHM_R" SILKSCREEN_TOP#14 105.8,68.3 r0 top
ZD4 "PDZV24B_0_SOD128-PDZV24B-ROHM_R" SILKSCREEN_TOP#14 127.7,68.3 r0 top
ZD5 "PDZV24B_0_SOD128-PDZV24B-ROHM_R" SILKSCREEN_TOP#14 72.5,68.3 r0 top
ZD6 "PDZV24B_0_SOD128-PDZV24B-ROHM_R" SILKSCREEN_TOP#14 65.2,68.3 r0 top
ZD7 "PDZV24B_0_SOD128-PDZV24B-ROHM_R" SILKSCREEN_TOP#14 57.9,68.3 r0 top
ZD8 "PDZV24B_0_SOD128-PDZV24B-ROHM_R" SILKSCREEN_TOP#14 79.8,68.3 r0 top
ZD9 "PDZV24B_0_SOD128-PDZV24B-ROHM_R" SILKSCREEN_TOP#14 24.6,68.3 r0 top
ZD10 "PDZV24B_0_SOD128-PDZV24B-ROHM_R" SILKSCREEN_TOP#14 17.3,68.3 r0 top
ZD11 "PDZV24B_0_SOD128-PDZV24B-ROHM_R" SILKSCREEN_TOP#14 10,68.3 r0 top
ZD12 "PDZV24B_0_SOD128-PDZV24B-ROHM_R" SILKSCREEN_TOP#14 31.9,68.3 r0 top

## Footprints (in the part's own frame and the unit in brackets; to place one, negate y for a bottom-side part, rotate by r counter-clockwise, add the part's x,y. Pads: shape width x height; smd on the part's side, far side on the other; paste and mask are expansions set on the pad)
ASSEMBLY_TOP#1 [mm] "ASSEMBLY_TOP"
  round 2.8 hole 1.8: 1(5.94,-5.5) 2(1.98,-5.5) 3(-1.98,-5.5) 4(-5.94,-5.5)
  round 1.6 hole 1.6 unplated: ""(-7.44,4.63) ""(7.44,4.63)
  silkscreen extent -8.29,-8 8.29,7.1, body extent -8.29,-7.1 8.29,7.1, height 3.81
ASSEMBLY_TOP#2 [mm] "ASSEMBLY_TOP"
  rect 3.25x3.45 smd: 1(-4.675,0) 2(4.675,0)
  silkscreen extent -6.55,-2 6.55,2, body extent -4.4,-3.2 4.4,3.2, height 3.81
ASSEMBLY_TOP#3 [mm] "ASSEMBLY_TOP"
  round 8 / inner round 6 / far side round 8 hole 4: 1(0,0)
  silkscreen extent -4,-4 4,4, body extent -4.01,-4.01 4.01,4.01, height 3.81
DIMENSION#1 [mm] "DIMENSION"
  rect 0.76x2.16 smd: 1(-1.27,-4.27) 2(0,-4.27) 3(1.27,-4.27) 4(1.27,4.27) 5(0,4.27) 6(-1.27,4.27)
  silkscreen extent -2.29,-6.2 2.29,2.9, body extent -2.29,-4.85 2.29,4.85, height 3.81
DIMENSION#2 [mm] "DIMENSION"
  rect 0.7x0.8 smd: 1(-0.65,0) 2(0.65,0)
  silkscreen extent -1.2,-0.6 1.2,0.6
DISPLAY_TOP [mm] "DISPLAY_TOP"
  rect 3.5x1.6 smd: 1(2.7,0) 2(-2.7,0)
  silkscreen extent -3.3,-3.3 4.6,3.3, body extent -3.9,-3.5 3.9,3.5, height 3.81
SILK_SINGLE_TOP [mm] "SILK_SINGLE_TOP"
  rect 0.8x1 smd: 1(-0.7,0) 2(0.7,0)
  silkscreen extent -1.3,-0.7 1.3,0.7, body extent -1.3,-0.7 1.3,0.7, height 3.81
SILKSCREEN_BOTTOM#1 [mm] "SILKSCREEN_BOTTOM"
  rect 0.56x3.45 smd: 1(31.105,0.725) 3(29.835,0.725) 5(28.565,0.725) 7(27.295,0.725) 9(26.025,0.725) 11(24.755,0.725) 13(23.485,0.725) 15(22.215,0.725) 17(20.945,0.725) 19(19.675,0.725) 21(18.405,0.725) 23(17.135,0.725) 25(15.865,0.725) 27(14.595,0.725) 29(13.325,0.725) 31(12.055,0.725) 33(10.785,0.725) 35(9.515,0.725) 37(8.245,0.725) 39(6.975,0.725) 41(4.435,0.725) 43(3.165,0.725) 45(1.895,0.725) 47(0.625,0.725) 49(-0.645,0.725) 51(-1.915,0.725) 53(-3.185,0.725) 55(-4.455,0.725) 57(-5.725,0.725) 59(-6.995,0.725) 61(-8.265,0.725) 63(-9.535,0.725) 65(-10.805,0.725) 67(-12.075,0.725) 69(-13.345,0.725) 71(-14.615,0.725) 73(-15.885,0.725) 75(-17.155,0.725) 77(-18.425,0.725) 79(-19.695,0.725) 81(-20.965,0.725) 83(-22.235,0.725) 85(-23.505,0.725) 87(-24.775,0.725) 89(-26.045,0.725) 91(-27.315,0.725) 93(-28.585,0.725) 95(-29.855,0.725) 97(-31.125,0.725)
  rect 0.56x3.45 smd far side: 2(31.105,0.725) 4(29.835,0.725) 6(28.565,0.725) 8(27.295,0.725) 10(26.025,0.725) 12(24.755,0.725) 14(23.485,0.725) 16(22.215,0.725) 18(20.945,0.725) 20(19.675,0.725) 22(18.405,0.725) 24(17.135,0.725) 26(15.865,0.725) 28(14.595,0.725) 30(13.325,0.725) 32(12.055,0.725) 34(10.785,0.725) 36(9.515,0.725) 38(8.245,0.725) 40(6.975,0.725) 42(4.435,0.725) 44(3.165,0.725) 46(1.895,0.725) 48(0.625,0.725) 50(-0.645,0.725) 52(-1.915,0.725) 54(-3.185,0.725) 56(-4.455,0.725) 58(-5.725,0.725) 60(-6.995,0.725) 62(-8.265,0.725) 64(-9.535,0.725) 66(-10.805,0.725) 68(-12.075,0.725) 70(-13.345,0.725) 72(-14.615,0.725) 74(-15.885,0.725) 76(-17.155,0.725) 78(-18.425,0.725) 80(-19.695,0.725) 82(-20.965,0.725) 84(-22.235,0.725) 86(-23.505,0.725) 88(-24.775,0.725) 90(-26.045,0.725) 92(-27.315,0.725) 94(-28.585,0.725) 96(-29.855,0.725) 98(-31.125,0.725)
  body extent -32.62,-3.5 32.63,3.5, height 3.81
SILKSCREEN_BOTTOM#2 [mm] "SILKSCREEN_BOTTOM"
  rect 1.27x1.67 hole 0.8: 2(-14.224,14.7) 3(-10.668,14.7) 4(-7.112,14.7) 5(-3.556,14.7) 6(-1.778,14.7) 7(0,14.7) 8(1.778,14.7) 9(3.556,14.7) 10(5.334,14.7) 11(7.112,14.7) 12(8.89,14.7) 13(10.668,14.7) 14(12.446,14.7) 15(14.224,14.7) 16(16.002,14.7) 17(17.78,14.7)
  round 1.6 hole 1: 18(17.78,-14.7) 19(15.24,-14.7) 20(12.7,-14.7) 21(7.62,-14.7) 22(2.54,-14.7) 23(-2.54,-14.7) 24(-7.62,-14.7)
  round 1.6 hole 0.9: ""(-17.78,-14.7)
  silkscreen extent -19,-12 19,12, body extent -19,-16 19,16, height 3.81
SILKSCREEN_BOTTOM#3 [mm] "SILKSCREEN_BOTTOM"
  rect 3.94x5.84 smd: 1(-4.575,0) 2(4.575,0)
  silkscreen extent -6.8,-3.55 6.8,3.55, body extent -5.8,-3.55 5.8,3.55, height 3.81
SILKSCREEN_TOP#1 [mm] "SILKSCREEN_TOP"
  rect 1x1.45 smd: 1(-0.9,0) 2(0.9,0)
  silkscreen extent -1.6,-0.92 1.6,0.92, body extent -1.6,-0.92 1.6,0.92, height 3.81
SILKSCREEN_TOP#2 [mm] "SILKSCREEN_TOP"
  rect 1.25x3.45 smd far side: 01(6.97,-0.728) 03(4.97,-0.725) 07(0.97,-0.725) 09(-1.03,-0.725) 11(-3.03,-0.725) 13(-5.03,-0.725) 15(-7.03,-0.725)
  rect 1.25x3.45 smd: 02(6.97,-0.728) 04(4.97,-0.725) 08(0.97,-0.725) 10(-1.03,-0.725) 12(-3.03,-0.725) 14(-5.03,-0.725) 16(-7.03,-0.725)
  body extent -8.47,-3.5 8.47,3.5, height 3.81
SILKSCREEN_TOP#3 [mm] "SILKSCREEN_TOP"
  round 2.5 hole 1.5: 1(-7.5,0) 2(7.5,0)
  silkscreen extent -9,-4 9,4, body extent -9,-4 9,4, height 3.81
SILKSCREEN_TOP#4 [mm] "SILKSCREEN_TOP"
  rect 1.6x5.4 smd: 1(-2.7,-0.05) 2(2.7,-0.05)
  silkscreen extent -3.75,-3 3.75,2.9, body extent -3.7,-2.95 3.7,2.95, height 3.81
SILKSCREEN_TOP#5 [mm] "SILKSCREEN_TOP"
  rect 0.63x0.831 smd: 1(-1.115,0) 2(1.115,0)
  silkscreen extent -1.75,-0.6 0.9,0.6, body extent -1.1,-0.7 1.1,0.7, height 3.81
SILKSCREEN_TOP#6 [mm] "SILKSCREEN_TOP"
  rect 1.7x1.7 hole 1.15: 1(-7.49,1.75)
  round 1.7 hole 1.15: 2(-4.95,1.75) 4(0.13,1.75) 5(2.67,1.75) 6(5.21,1.75) 7(7.75,1.75)
  silkscreen extent -9.75,-3 9.75,4, body extent -9.75,-3 9.75,3, height 3.81
SILKSCREEN_TOP#7 [mm] "SILKSCREEN_TOP"
  rect 0.55x0.65 smd: 1(0.45,0) 2(-0.45,0)
  silkscreen extent -0.85,-0.45 0.85,0.45, body extent -0.8,-0.45 0.8,0.45, height 3.81
SILKSCREEN_TOP#8 [mm] "SILKSCREEN_TOP"
  round 1.2 hole 0.7: 1(-3.6,-5.35) 2(-1.8,-5.35) 3(0,-5.35) 4(1.8,-5.35) 5(3.6,-5.35)
  round 1.9 hole 1.2: 6(-9.45,5.85) 7(-4.7,5.85) 8(4.7,5.85) 9(9.45,5.85)
  silkscreen extent -12.27,-8.45 12.27,7.52, body extent -12.27,-7.53 12.27,7.52, height 3.81
SILKSCREEN_TOP#9 [mm] "SILKSCREEN_TOP"
  rect 0.8x0.8 smd: 1(0.75,0) 2(-0.75,0)
  silkscreen extent -1.55,-0.6 1.3,0.6, body extent -1.3,-0.55 1.3,0.55, height 3.81
SILKSCREEN_TOP#10 [mm] "SILKSCREEN_TOP"
  rect 0.64x1.5 smd: 1(-1.905,-3.1) 2(-0.635,-3.1) 3(0.635,-3.1) 4(1.905,-3.1) 5(1.905,3.1) 6(0.635,3.1) 7(-0.635,3.1) 8(-1.905,3.1)
  silkscreen extent -2.97,-3.82 2.45,2.07, body extent -2.45,-3.25 2.45,3.25, height 3.81
SILKSCREEN_TOP#11 [mm] "SILKSCREEN_TOP"
  rect 0.8x1.2 smd: 1(-1.27,-3) 2(1.27,-3) 3(1.27,3) 4(-1.27,3)
  silkscreen extent -3.08,-4.71 2.15,3.4, body extent -2.15,-3.7 2.15,3.7, height 3.81
SILKSCREEN_TOP#12 [mm] "SILKSCREEN_TOP"
  rect 0.8x0.9 smd: 1(-0.95,-1) 2(0.95,-1) 3(0,1)
  silkscreen extent -1.45,-1.93 1.45,0.3, body extent -1.45,-1.25 1.45,1.25, height 3.81
SILKSCREEN_TOP#13 [mm] "SILKSCREEN_TOP"
  rect 1.3x1.5 smd: 1(-1.55,0) 2(1.55,0)
  silkscreen extent -2.4,-0.95 2.4,0.95, body extent -2.4,-0.95 2.4,0.95, height 3.81
SILKSCREEN_TOP#14 [mm] "SILKSCREEN_TOP"
  rect 1.4x2 smd: 1(-2.2,0) 2(2.2,0)
  silkscreen extent -3.6,-1.53 2.63,1.52

## Via types
v1: diameter 0.6, hole 0.3, TOP to BOTTOM, 546 vias
v2: diameter 0.4, hole 0.4, TOP to BOTTOM, 56 vias
v3: diameter 6.5, hole 6.5, TOP to BOTTOM, 6 vias
v4: diameter 0.1/0.1/0.1/0.1 (per signal layer), hole 4, TOP to BOTTOM, 4 vias
v5: diameter 4, hole 4, TOP to BOTTOM, 2 vias